# Altium PCB CoreV1.1_test.PcbDoc (part 3 of 14)
Units mil, origin at the board's own origin, x right, y up, seen from the top; angles counter-clockwise.
Board outline 2860 x 2420 mil, 6 copper layers (Top Layer, GND, SIGNAL_1, SIGNAL_2, POWER, Bottom Layer); 110 components, 241 nets, 882 pads, 697 vias.
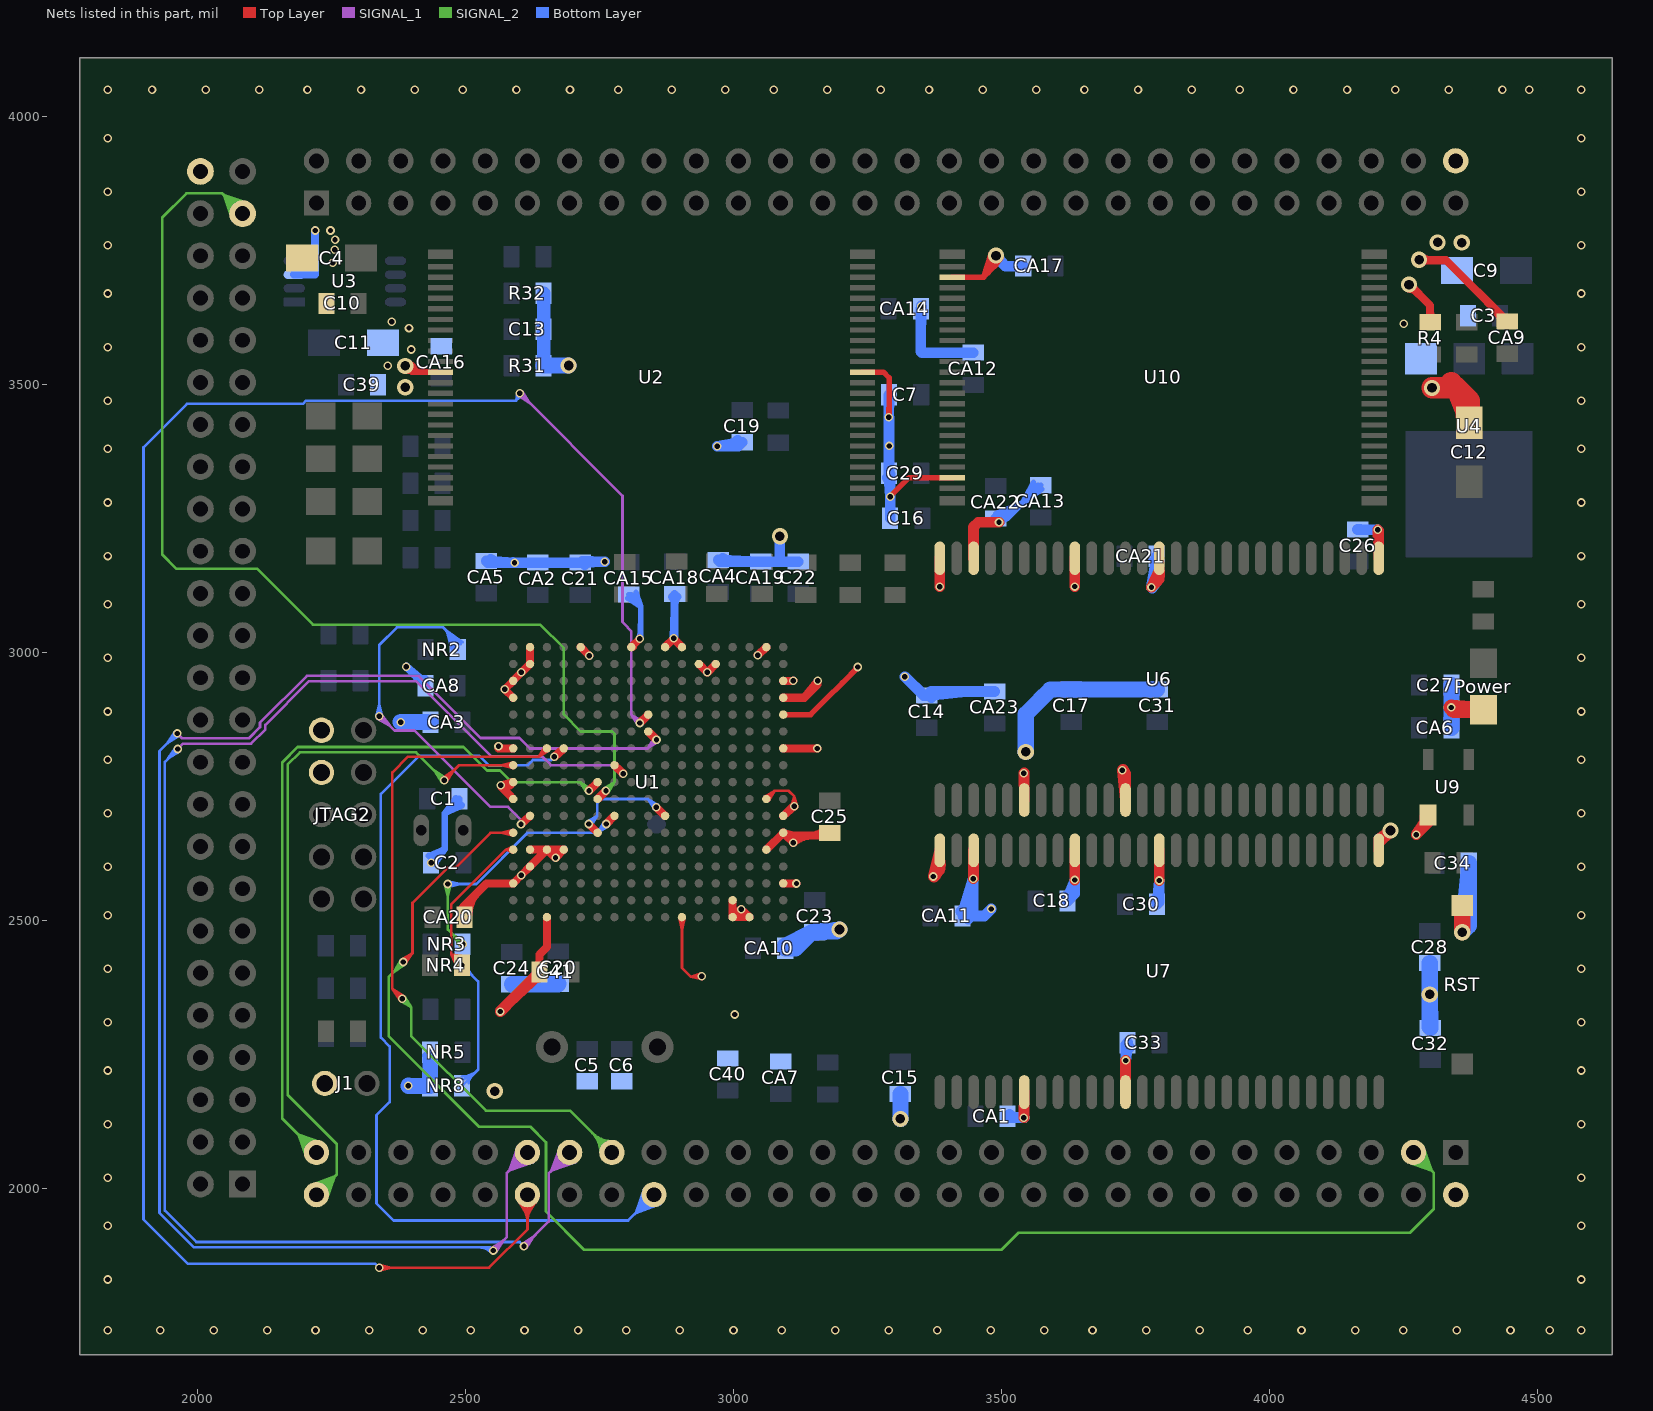
[diagram p7: the nets of this part, all layers, seen from the top]

## Via types
v1: diameter 16, hole 10, Top Layer to Bottom Layer, tented both sides, 637 vias
v2: diameter 30, hole 18, Top Layer to Bottom Layer, tented both sides, 56 vias
v3: diameter 16, hole 10, Top Layer to Bottom Layer, 2 vias
v4: diameter 30, hole 16, Top Layer to Bottom Layer, tented both sides, 1 vias
v5: diameter 16/16/16/16 (per signal layer), hole 10, Top Layer to Bottom Layer, tented both sides, 1 vias

## Nets (pads, with @x,y where several pads share a name; then routed paths per layer and width w, separated by ;. In a path a pad name is that pad's centre, name@x,y a point inside that pad or via, vN(x,y) a via of type N, cw(c..) or ccw(c..) an arc to the next point about the centre after c; other vN are vias at no path point) (continued)
EINT19: pad.PA3 U1.U12 | length 3718.8
  Top Layer w5: v1@2380.21,2426.91 2401,2439 ; v1@2383.5,2421.5 2384,2422 2401,2439 ; v1(2383.5,2422.5) 2401,2439 ; v1@2383.5,2428 ccw(c2383.5,2443.69) 2394.6,2432.6 ; v1@2387.71,2418.96 2401,2439 ; v1@2389,2422.5 cw(c2399.86,2422.5) 2392.18,2430.18 ; 2575.59,2663.5 ccw(c2575.59,2676.97) U1.U12@2585.12,2667.45 ; 2576.29,2663.5 cw(c2576.29,2651.02) U1.U12@2585.12,2659.85 ; U1.U12@2588.25,2668.98 2566.04,2663.5 ; U1.U12@2588.32,2658.31 2566.04,2663.5 ; 2401,2439 2401,2533 2466,2598 2481.08,2598 2546.58,2663.5 2588.77,2663.5 U1.U12@2588.92,2663.65 2566.04,2663.5
  SIGNAL_2 w5: 2373.4,2411.4 ccw(c2362.31,2422.5) v1@2378,2422.5 ; 2375.82,2413.82 cw(c2383.5,2406.14) v1@2383.5,2417 ; v1@2379.13,2425.84 2365.53,2403.53 ; v1@2387.07,2418.32 2365.53,2403.53 ; 3812.81,1917.19 3800,1917.19 ; pad.PA3@4257.72,2049.22 4303.27,2032.83 ; pad.PA3@4259.7,2053.92 4303.27,2032.83 ; pad.PA3@4262.13,2058.34 4303.27,2032.83 ; pad.PA3@4264.99,2062.46 4303.27,2032.83 ; pad.PA3@4269.04,2045.93 cw(c4269.04,1994.94) 4305.1,2031 cw(c4341.15,2067.06) pad.PA3@4290.16,2067.06 ; pad.PA3@4269.04,2050.93 cw(c4269.04,2012.01) 4296.56,2039.53 cw(c4324.08,2067.06) pad.PA3@4285.16,2067.06 ; pad.PA3@4269.04,2055.93 cw(c4269.04,2029.08) 4288.03,2048.07 cw(c4307.01,2067.06) pad.PA3@4280.16,2067.06 ; pad.PA3@4269.04,2067.06 4307,2029.1 4307,1962 4262.19,1917.19 3800,1917.19 ; pad.PA3@4273.63,2071.1 4303.27,2032.83 ; pad.PA3@4277.76,2073.97 4303.27,2032.83 ; pad.PA3@4282.18,2076.4 4303.27,2032.83 ; pad.PA3@4286.87,2078.37 4303.27,2032.83 ; 2365.53,2403.53 v1(2383.5,2422.5) 2383.5,2421.5 2356.5,2394.5 2356.5,2284.01 2525.51,2115 2621,2115 2650,2086 2650,1957 2721.5,1885.5 3500.42,1885.5 3532.11,1917.19 3800,1917.19
EINT20: pad.PB47 U1.M10 | length 2952.9
  Top Layer w5: U1.M10@2746.4,2732.01 ccw(c2746.4,2744.99) 2755.57,2735.81 ccw(c2764.75,2726.64) U1.M10@2751.77,2726.64 ; v1@2756.5,2742.24 cw(c2743.22,2742.24) 2752.61,2732.85 cw(c2762,2723.46) v1@2762,2736.74 ; v1@2756.97,2744.46 U1.M10@2750.63,2723.33 ; v1@2757.66,2745.61 U1.M10@2746.4,2726.64 ; v1@2758.6,2746.56 U1.M10@2743.09,2730.87 ; v1@2764.22,2737.21 U1.M10@2743.09,2730.87 ; v1@2765.37,2737.9 U1.M10@2746.4,2726.64 ; v1@2766.32,2738.84 U1.M10@2750.63,2723.33 ; U1.M10@2743.09,2730.87 v1(2762,2742.24) ; U1.M10@2743.09,2730.87 v1(2762,2742.24) ; U1.M10@2746.4,2726.64 v1(2762,2742.24) ; U1.M10@2746.4,2726.64 v1(2762,2742.24) ; U1.M10@2750.63,2723.33 v1(2762,2742.24) ; U1.M10@2750.63,2723.33 v1(2762,2742.24)
  SIGNAL_2 w5: pad.PB47@2061.5,3819.21 ccw(c2008.66,3819.63) 2046.03,3857 ccw(c2083.39,3894.36) pad.PB47@2083.82,3841.52 ; pad.PB47@2064.94,3807.07 2048.39,3854.63 ; pad.PB47@2066.5,3819.17 ccw(c2025.4,3819.5) 2054.46,3848.56 ccw(c2083.53,3877.62) pad.PB47@2083.86,3836.52 ; pad.PB47@2069.66,3808.99 2048.39,3854.63 ; pad.PB47@2071.5,3819.13 ccw(c2042.15,3819.36) 2062.9,3840.12 ccw(c2083.66,3860.88) pad.PB47@2083.9,3831.52 ; pad.PB47@2074.13,3811.35 2048.39,3854.63 ; pad.PB47@2078.32,3814.13 2048.39,3854.63 ; pad.PB47@2084,3819.02 2046.02,3857 1979,3857 1934,3812 1934,3182.5 1959.9,3156.6 2110.9,3156.6 2215.39,3052.11 2639.34,3052.11 2683.41,3008.04 2683.41,2884.12 2714.8,2852.72 2733.78,2852.72 ; pad.PB47@2088.89,3824.71 2048.39,3854.63 ; pad.PB47@2091.67,3828.89 2048.39,3854.63 ; pad.PB47@2094.04,3833.36 2048.39,3854.63 ; pad.PB47@2095.95,3838.09 2048.39,3854.63 ; 2733.5,2853 2733.78,2852.72 ; v1@2758.61,2746.57 2778.02,2758.26 ; v1(2762,2742.24) 2778.02,2758.26 ; v1@2762,2747.74 ccw(c2762,2761.02) 2771.39,2751.63 ccw(c2780.78,2742.24) v1@2767.5,2742.24 ; v1@2766.33,2738.85 2778.02,2758.26 ; 2733.78,2852.72 2773.94,2852.72 2778,2848.67 2778,2780.7 2778.02,2758.26
GND: C1.2 C2.2 C3.2 C4.2 C5.2 C6.2 C7.2 C9.2 C10.2 C11.2 C12.2 C13.2 C14.2 C15.2 C16.2 C17.2 C18.2 C19.2 C20.2 C21.2 C22.2 C23.2 C24.2 C25.2 C26.2 C27.2 C28.2 C29.2 C30.2 C31.2 C32.2 C33.2 C34.2 C39.2 C40.2 C41.2 CA1.2 CA2.2 CA3.2 CA4.2 CA5.2 CA6.2 CA7.2 CA8.2 CA9.2 CA10.2 CA11.2 CA12.2 CA13.2 CA14.2 CA15.2 CA16.2 CA17.2 CA18.2 CA19.2 CA20.2 CA21.2 CA22.2 CA23.2 J1.2 JTAG2.8 JTAG2.10 NR5.2 NR8.2 pad.PA2 pad.PB50 pad.PC56 Power.2 R4.2 R31.1 R32.1 RST.2 U1.A3 U1.A4 U1.A5 U1.A7 U1.A11 U1.A12 U1.A15 U1.B1 U1.B10 U1.B13 U1.C17 U1.D16 U1.D17 U1.E2 U1.F2 U1.G1 U1.G17 U1.H1 U1.H11 U1.K1 U1.M12 U1.N1 U1.P13 U1.R13 U1.R17 U1.T1 U1.T2 U1.T13 U1.T14 U1.U3 U1.U4 U1.U7 U1.U9 U1.U10 U1.U15 U2.13 U2.36 U3.3 U4.2 U6.6 U6.12 U6.28 U6.41 U6.46 U6.52 U6.54 U7.6 U7.12 U7.28 U7.41 U7.46 U7.52 U7.54 U9.1 U10.27 U10.46 | length 19720
  Top Layer w5: U1.G17@2898.54,2505.53 2903.88,2483.29 U1.G17@2909.21,2505.53 ; U1.G17@2900.08,2502.36 cw(c2890.9,2493.19) 2903.88,2493.19 cw(c2916.85,2493.19) U1.G17@2907.68,2502.36 ; U1.G17@2903.88,2506.16 2903.88,2411.12 2920,2395 ; 2925.31,2395 ccw(c2925.31,2411.69) v1@2937.11,2399.89 ; 2930.14,2395 cw(c2930.14,2385.14) v1@2937.11,2392.11 ; v1@2940.02,2401.41 2920,2395 ; v1@2940.54,2390.52 2920,2395 ; U1.B10@3058.06,2730.88 3076.73,2742.01 ; U1.B10@3061.36,2726.64 3076.73,2742.01 ; U1.B10@3061.36,2732.01 ccw(c3061.36,2744.99) 3070.53,2735.81 ccw(c3079.71,2726.64) U1.B10@3066.73,2726.64 ; U1.B10@3065.6,2723.34 3076.73,2742.01 ; v1@3108.06,2713.82 3113.5,2731.51 ; v1@3109.61,2716.89 ccw(c3100.22,2726.28) 3113.5,2726.28 ccw(c3126.78,2726.28) v1@3117.39,2716.89 ; v1(3113.5,2713) 3113.5,2731.51 ; v1@3118.94,2713.82 3113.5,2731.51 ; v1@3232,2972 v1(3232,2973) ; 2920,2395 2940,2395 v1(2941,2396) 2920,2395 ; 3076.73,2742.01 3103,2742.01 3113.5,2731.51
  Top Layer w10: v2@2386.09,3525.1 U2.36@2434.72,3523.21 ; v2@2394.57,3542.07 ccw(c2440.11,3587.61) U2.36@2440.11,3523.21 ; 2399.8,3523.21 U2.36@2434.72,3523.21 ; 2415.97,3523.21 cw(c2415.97,3563.47) v2(2387.5,3535) ; U2.36@2453.42,3523.21 2399.29,3523.21 v2(2387.5,3535) ; U1.A11@3092.85,2695.14 U1.A11@3094.71,2697 ; U1.A5@3092.85,2884.12 3144.12,2884.12 v1@3232,2972 ; 3203.32,2943.32 v1(3232,2973) ; 3226.17,2966.17 ccw(c3219.34,2973) v1@3229,2973 ; U2.13@3240.83,3523.21 3279.95,3523.21 ; U2.13@3259.53,3523.21 3279.95,3523.21 ; v1@3287.88,3441.12 ccw(c3281.82,3447.18) 3290.39,3447.18 ; 3290.39,3477.01 v1(3290,3439) 3290.39,3439.39 3290.39,3512.77 3279.95,3523.21 ; v1(3292.39,3291) 3327.75,3326.36 U10.46@3408.42,3326.36 ; 3354.8,3326.36 U10.46@3389.72,3326.36 ; U10.27@3408.42,3700.37 3466.94,3700.37 ; U10.27@3427.12,3700.37 3462.05,3700.37 ; 3475.47,3708.91 ccw(c3457.7,3726.68) v2@3480.81,3736.57 ; v2@3480.84,3744.52 3466.94,3700.37 ; v2@3484.52,3732.13 cw(c3478.5,3722.93) 3489.5,3722.93 ; 3485.92,3719.36 ccw(c3472.34,3732.94) v2(3490,3740.5) ; v1@3492.5,3246 v1(3495.5,3243) ; v2@3494.74,3731.69 ccw(c3499.45,3722.93) 3489.5,3722.93 ; v2@3498.08,3734.61 3466.94,3700.37 ; U6.46@3633.67,3150.84 cw(c3625.41,3142.57) 3637.1,3142.57 cw(c3648.79,3142.57) U6.46@3640.52,3150.84 ; U6.46@3637.1,3154.26 3637.1,3141.9 U6.46@3637.1,3175.91 ; v2(2387.5,3535) U2.36@2434.72,3523.21 ; 3466.94,3700.37 3489.5,3722.93 ; 3466.94,3700.37 v2(3490,3740.5) ; 3489.5,3722.93 3489.5,3740 v2(3490,3740.5) ; 3489.5,3722.93 3499.5,3737.38 3489.5,3722.93 ; 3489.5,3722.93 3480.34,3737.93 3489.5,3722.93 ; 3489.5,3722.93 v2(3490,3740.5) ; 3489.5,3722.93 v2(3490,3740.5)
  Top Layer w15: CA20.2@2490.61,2510.65 cw(c2514.65,2510.65) 2497.65,2527.65 ; CA20.2@2492.95,2516.09 ccw(c2481.55,2528.11) 2498.11,2528.11 ; CA20.2@2498.11,2505.65 2498.11,2528.11 ; CA20.2@2503.27,2516.09 cw(c2514.68,2528.11) 2498.11,2528.11 ; CA20.2@2505.61,2510.65 cw(c2565.87,2510.65) 2523.26,2553.26 ; v1@2561.85,2825.35 ccw(c2572.06,2835.56) 2572.06,2821.13 ; v1@2573.23,2752.01 ccw(c2573.23,2773.82) U1.U9@2588.65,2758.4 ; U1.U7@2588.92,2821.13 v1@2565.37,2821.13 ; U1.U3@2588.92,2945.78 U1.U3@2588.92,2947.11 ; C41.2@2632.58,2414.15 ccw(c2619.78,2426.95) 2637.89,2426.95 ccw(c2655.99,2426.95) C41.2@2643.19,2414.15 ; C41.2@2637.89,2403.85 2637.89,2436.28 ; C41.2@2637.89,2408.85 2637.89,2436.28 ; U1.R17@2651.91,2506.16 2651.91,2450.3 2637.89,2436.28 ; v1@2667.47,2616.71 ccw(c2651.91,2616.59) U1.R13@2651.91,2632.15 ; U1.K1@2812.07,3010.1 U1.K1@2809.39,3010.1 ; v1@3013.75,2521.55 v1@3013,2520.8 ; v1@3014,2520.83 cw(c2998.37,2521.83) U1.D17@2998.37,2506.16 ; v1@3015,2520.81 ccw(c3029.86,2521.03) U1.C17@3029.86,2506.16 ; U1.B13@3061.36,2632.15 3076.71,2647.5 ; U1.A12@3092.85,2663.35 3077,2647.5 U1.A12@3092.85,2663.65 ; U1.A7@3092.85,2821.13 3145.73,2821.13 ; U1.A4@3092.85,2915.61 3132.48,2915.61 ; U1.A12@3093.12,2663.91 ccw(c3106.18,2676.97) 3106.18,2658.5 ; U1.A7@3097.85,2821.13 3155.87,2821.13 v1@3151,2821 ; U1.A7@3097.95,2821.13 v1(3156.5,2821) 3103.5,2821.13 ; 3101.25,2655.25 cw(c3109.09,2647.41) 3109.09,2658.5 ; v1@3111.85,2644.65 cw(c3145.3,2611.2) 3145.3,2658.5 ; 3144.75,2658.5 ccw(c3144.75,2693.3) C25.2@3169.35,2668.69 ; 3151.29,2934.42 ccw(c3138.72,2947) v1@3156.5,2947 ; C25.2@3179.65,2663.39 3174.77,2658.5 3111.5,2658.5 ; v2@4260.5,3679 cw(c4260.5,3658.48) 4275.01,3672.99 ; v2(4260.5,3686.5) 4300.09,3647.91 ; v2@4261.5,3686.5 4300.09,3647.91 ; v2@4268,3686.5 ccw(c4283.69,3686.5) 4272.6,3675.4 ; v2(4279.5,3733) 4329.96,3732 ; v2@4282,3732 4329.96,3732 ; v2@4284.8,3727.7 cw(c4295.19,3717.31) 4295.19,3732 ; v2@4284.8,3738.3 ccw(c4300.02,3753.52) 4300.02,3732 ; R4.2@4294.79,3621.57 ccw(c4281.98,3634.38) 4300.09,3634.38 ccw(c4318.2,3634.38) R4.2@4305.39,3621.57 ; R4.2@4300.09,3616.27 4300.09,3647.91 ; 4397.53,3664.43 CA9.2@4439.35,3617.61 ; 4423.01,3638.95 cw(c4401.67,3617.61) CA9.2@4431.85,3617.61 ; CA9.2@4444.35,3617.61 4329.96,3732 ; 2498.11,2528.11 2539.16,2569.16 ; 2498.11,2528.11 2498.11,2510.65 2498.11,2528.11 ; 2539.16,2569.16 U1.U15@2588.92,2569.16 ; 2539.16,2569.16 U1.U15@2588.92,2569.16 ; v1@2565.37,2821.13 v1(2561.5,2825) 2561.63,2821.13 v1@2565.37,2821.13 ; v1@2565.99,2749.57 U1.U10@2588.92,2726.64 ; v1@2565.99,2749.57 v1(2565.99,2752.01) ; v1@2565.99,2749.57 U1.U10@2588.92,2726.64 ; v1(2565.99,2752.01) 2582.79,2752.01 U1.U9@2588.92,2758.13 v1(2565.99,2752.01) ; v1(2565.99,2752.01) U1.U10@2588.92,2726.64 ; v1(2565.99,2752.01) U1.U10@2588.92,2726.64 ; v1(2573,2931.5) U1.U4@2588.92,2915.61 ; v1(2573,2931.5) U1.U3@2588.92,2947.11 ; v1(2573,2931.5) U1.U4@2588.92,2915.61 ; v1(2573,2931.5) U1.U3@2588.92,2947.11 ; v1(2573,2931.5) U1.U4@2588.92,2915.61 ; v1(2573,2931.5) v1@2573.31,2931.5 ; v1(2573,2931.5) U1.U4@2588.92,2915.61 ; v1@2573.31,2931.5 U1.U3@2588.92,2947.11 ; v1@2573.31,2931.5 U1.U3@2588.92,2947.11 ; U1.U15@2588.92,2569.16 v1(2604.13,2584.37) ; U1.U15@2588.92,2569.16 v1(2604.13,2584.37) ; U1.U3@2588.92,2947.11 U1.U3@2588.92,2947.92 ; U1.U3@2588.92,2947.11 v1(2604,2963) ; U1.U3@2588.92,2947.11 v1(2604,2963) ; U1.U3@2588.92,2947.92 v1(2604,2963) ; U1.U3@2588.92,2947.92 v1(2604,2963) ; v1(2604,2963) v1@2604.81,2963 ; v1(2604,2963) U1.T2@2620.41,2978.61 ; v1(2604,2963) U1.T2@2620.41,2978.61 ; v1(2604.13,2584.37) U1.T14@2620.41,2600.65 ; v1(2604.13,2584.37) U1.T14@2620.41,2600.65 ; v1@2604.81,2963 U1.T2@2620.41,2978.61 ; v1@2604.81,2963 U1.T2@2620.41,2978.61 ; U1.T14@2620.41,2600.65 U1.R13@2651.91,2632.15 ; U1.T14@2620.41,2600.65 U1.R13@2651.91,2632.15 ; U1.T2@2620.41,2978.61 U1.T1@2620.41,3010.1 U1.T2@2620.41,2978.61 ; U1.R13@2651.91,2632.15 2667.97,2632.15 ; U1.R13@2651.91,2632.15 U1.T13@2620.41,2632.15 U1.R13@2651.91,2632.15 ; U1.R13@2651.91,2632.15 v1(2667.97,2616.71) ; v1(2667.97,2616.71) U1.P13@2683.41,2632.15 ; v1(2667.97,2616.71) U1.P13@2683.41,2632.15 ; v1(2667.97,2616.71) 2667.97,2632.15 ; v1(2667.97,2616.71) U1.P13@2683.41,2632.15 ; v1(2667.97,2616.71) 2667.97,2632.15 ; v1(2667.97,2616.71) U1.P13@2683.41,2632.15 ; v1(2667.97,2616.71) 2667.97,2632.15 ; 2667.97,2632.15 U1.P13@2683.41,2632.15 ; 2667.97,2632.15 U1.P13@2683.41,2632.15 ; U1.K1@2809.39,3010.1 v1(2825,3025.71) U1.K1@2809.39,3010.1 ; v1(2856,2711) v1@2856.52,2711 ; v1(2856,2711) U1.H11@2872.38,2695.14 ; v1(2856,2711) U1.H11@2872.38,2695.14 ; v1@2856.52,2711 U1.H11@2872.38,2695.14 ; v1@2856.52,2711 U1.H11@2872.38,2695.14 ; v1@2888.5,3025.48 U1.G1@2903.88,3010.1 ; v1@2888.5,3025.48 v1@2888.5,3026.22 ; v1@2888.5,3025.48 U1.G1@2903.88,3010.1 ; v1@2888.5,3026.22 2888.64,3026.36 2888.78,3026.5 v1(2888.5,3026.5) ; v1@2888.5,3026.22 v1(2888.5,3026.5) ; v1@2888.5,3026.22 U1.H1@2872.38,3010.1 v1(2888.5,3026.5) ; v1(2888.5,3026.5) U1.G1@2903.88,3010.1 ; v1(2888.5,3026.5) U1.G1@2903.88,3010.1 ; v1(2951.26,2963) U1.E2@2966.87,2978.61 v1(2951.26,2963) ; v1(2951.26,2963) 2950.98,2963 U1.F2@2935.37,2978.61 v1(2951.26,2963) ; U1.D17@2998.37,2506.16 3014.5,2506.16 ; U1.D17@2998.37,2506.16 U1.D16@2998.37,2537.66 U1.D17@2998.37,2506.16 ; U1.D17@2998.37,2506.16 v1@3013,2520.8 ; U1.D17@2998.37,2506.16 U1.C17@3029.86,2506.16 ; U1.D17@2998.37,2506.16 v1(3014.5,2520.8) ; U1.D17@2998.37,2506.16 v1(3014.5,2520.8) ; U1.D17@2998.37,2506.16 v1(3014.5,2520.8) ; v1@3013,2520.8 v1(3014.5,2520.8) ; 3014.5,2506.16 U1.C17@3029.86,2506.16 ; 3014.5,2506.16 U1.C17@3029.86,2506.16 ; 3014.5,2506.16 U1.C17@3029.86,2506.16 ; 3014.5,2506.16 v1(3014.5,2520.8) ; 3014.5,2506.16 v1(3014.5,2520.8) ; 3014.5,2506.16 v1(3014.5,2520.8) ; 3014.5,2506.16 v1(3014.5,2520.8) ; v1(3014.5,2520.8) U1.C17@3029.86,2506.16 ; v1(3014.5,2520.8) U1.C17@3029.86,2506.16 ; v1(3014.5,2520.8) U1.C17@3029.86,2506.16 ; v1(3014.5,2520.8) U1.C17@3029.86,2506.16 ; v1(3045,2995) v1@3046.26,2995 ; v1(3045,2995) U1.B1@3061.36,3010.1 ; v1(3045,2995) U1.B1@3061.36,3010.1 ; v1@3046.26,2995 U1.B1@3061.36,3010.1 ; v1@3046.26,2995 U1.B1@3061.36,3010.1 ; U1.A12@3092.85,2663.65 U1.A12@3098,2658.5 ; U1.A12@3092.85,2663.65 3111.5,2658.5 ; U1.A12@3092.85,2663.65 v1(3111.5,2645) ; U1.A12@3092.85,2663.65 v1(3111.5,2645) ; U1.A12@3092.85,2663.65 v1(3111.5,2645) ; U1.A12@3098,2658.5 3111.5,2658.5 ; U1.A12@3098,2658.5 v1(3111.5,2645) ; U1.A12@3098,2658.5 v1(3111.5,2645) ; U1.A12@3098,2658.5 v1(3111.5,2645) ; v1@3110.71,2713 3094.71,2697 v1(3113.5,2713) ; v1@3110.71,2713 v1(3113.5,2713) ; v1@3110.71,2713 U1.A11@3092.85,2695.14 v1(3113.5,2713) ; v1(3111.5,2645) 3111.5,2658.5 ; v1(3111.5,2645) 3111.5,2658.5 ; v1(3111.5,2645) 3111.5,2658.5 ; 3132.48,2915.61 3157,2940.13 v1(3157,2947) 3132.48,2915.61 ; U1.N1@2714.9,3010.1 v1(2731,2994) U1.N1@2714.9,3010.1 ; v1(2730.04,2680) U1.M12@2746.4,2663.65 v1(2730.04,2680) ; U1.A15@3092.85,2569.16 3117.34,2569.16 v1(3117.5,2569) U1.A15@3092.85,2569.16 ; U1.A3@3092.85,2947.11 3111.19,2947.11 v1(3111.54,2947.46) U1.A3@3092.85,2947.11
  Top Layer w20: 2580.46,2346.42 C41.2@2637.89,2398.85 ; 2614.91,2380.87 v1(2565,2330) 2565,2330.96 C41.2@2637.89,2403.85 ; 2620.82,2386.77 cw(c2637.89,2369.7) C41.2@2637.89,2393.85 ; v1@3374.41,2580.59 ccw(c3348.55,2606.45) U7.54@3385.13,2606.45 ; 3380.57,2589.57 ccw(c3366.87,2603.27) U7.54@3385.28,2609.31 ; U6.52@3448.12,3175.91 3448.12,3234.12 ; U6.52@3448.12,3197.57 3448.12,3234.12 ; U7.46@3637.1,2609.26 v1(3637.1,2575.6) U7.46@3637.1,2630.91 ; U6.46@3637.1,3154.26 v1(3637.1,3123.1) U6.46@3637.1,3175.91 ; v1@3726.91,2781.91 cw(c3715.64,2770.64) 3731.58,2770.64 ; 3788.84,3130.84 ccw(c3772.2,3147.49) U6.41@3794.73,3154.31 ; U7.41@3794.58,2609.26 v1(3794.58,2574.5) U7.41@3794.58,2630.91 ; U6.41@3794.58,3175.91 3794.58,3136.58 ; U7.28@4204.02,2630.91 U7.28@4204.02,2644.02 ; U7.28@4204.02,2652.41 ccw(c4204.02,2672.66) v2@4218.34,2658.34 ; 4216.05,2656.05 ccw(c4204.1,2668) v2@4221,2668 ; v1@4279.33,2665.33 ccw(c4252.53,2692.13) U9.1@4290.43,2692.74 ; U9.1@4296.17,2692.84 v1(4274,2660) 4296.17,2682.17 U9.1@4296.17,2696.77 ; v1(3373,2582) 3385.13,2594.13 ; v1(3373,2582) U7.54@3385.13,2609.26 ; v1(3373,2582) U7.54@3385.13,2609.26 ; v1(3373,2582) U7.54@3385.13,2609.26 ; v1(3373,2582) U7.54@3385.13,2630.91 3385.13,2594.13 ; v1(3385,3123) v1@3385.13,3123.13 ; v1(3385,3123) U6.54@3385.13,3175.91 v1@3385.13,3123.13 ; v1(3385,3123) 3385.13,3154.26 v1@3385.13,3123.13 ; 3385.13,2594.13 U7.54@3385.13,2609.26 ; 3385.13,2594.13 U7.54@3385.13,2609.26 ; v1(3447.5,2578) v1@3448.12,2578.62 ; v1(3447.5,2578) 3448.12,2609.26 v1@3448.12,2578.62 ; v1(3447.5,2578) U7.52@3448.12,2630.91 v1@3448.12,2578.62 ; 3448.12,3234.12 3457,3243 ; 3457,3243 v1(3495.5,3243) 3457,3243 ; v1(3542,2132) v1@3542.61,2132.61 ; v1(3542,2132) U7.6@3542.61,2179.73 v1@3542.61,2132.61 ; v1(3542,2132) 3542.61,2158.08 v1@3542.61,2132.61 ; v1(3542,2774.79) 3542.61,2775.39 v1@3542.61,2774.79 ; v1(3542,2774.79) 3542.61,2746.39 v1@3542.61,2774.79 ; v1(3542,2774.79) U6.6@3542.61,2724.73 v1@3542.61,2774.79 ; v1(3725.5,2780.5) 3731.58,2774.42 ; v1(3725.5,2780.5) 3731.58,2746.39 3731.58,2774.42 ; v1(3725.5,2780.5) U6.12@3731.58,2724.73 3731.58,2774.42 ; v1@3731.58,2238.37 U7.12@3731.58,2179.73 v1(3732,2238.79) ; v1@3731.58,2238.37 v1(3732,2238.79) ; v1@3731.58,2238.37 3731.58,2201.39 v1(3732,2238.79) ; 3794.58,3136.58 v1(3780,3122) U6.41@3794.58,3154.26 ; 3794.58,3136.58 U6.41@3794.58,3154.26 ; 3794.58,3136.58 U6.41@3794.58,3154.26 ; v1(4202.5,3229) v1@4204.02,3227.48 ; v1(4202.5,3229) U6.28@4204.02,3175.91 v1@4204.02,3227.48 ; v1(4202.5,3229) 4204.02,3197.57 v1@4204.02,3227.48 ; U7.28@4204.02,2644.02 v2@4226,2666 ; U7.28@4204.02,2644.02 v2(4226,2668) ; v2@4226,2666 v2(4226,2668) ; v2@4226,2666 4204.02,2652.57 v2(4226,2668)
  Top Layer w30: v2(4360,2478) RST.2@4360,2527.64 ; v1(4339.61,2897.5) 4344.15,2892.97 Power.2@4399.59,2892.97 v1(4339.61,2897.5)
  Top Layer w40: v2(4303.5,3494) 4349,3494 ; v2@4304.89,3494 4349,3494 ; 4339.16,3503.84 cw(c4269.13,3433.8) C12.2@4368.17,3433.8 ; C12.2@4373.17,3428.8 4373.17,3469.83 ; 4349,3494 4373.17,3469.83 ; 4349,3494 C12.2@4373.17,3433.8 ; C12.2@4373.17,3433.8 4373.17,3469.83 ; C12.2@4373.17,3433.8 4373.17,3469.83
  Bottom Layer w5: v1@2726.66,2684.33 2746,2695.96 ; v1(2730.04,2680) 2746,2695.96 ; v1@2730.04,2685.5 ccw(c2730.04,2698.78) 2739.43,2689.39 ccw(c2748.82,2680) v1@2735.54,2680 ; v1@2734.38,2676.61 2746,2695.96 ; v1@2850.5,2711 ccw(c2837.22,2711) 2846.61,2720.39 ccw(c2856,2729.78) v1@2856,2716.5 ; v1@2851.65,2707.63 2840.49,2726.51 ; v1@2859.37,2715.35 2840.49,2726.51 ; 2746,2695.96 2746,2719 2753.51,2726.51 2840.49,2726.51 ; 2840.49,2726.51 v1(2856,2711) 2840.49,2726.51
  Bottom Layer w10: CA15.2@2802.65,3100.96 2827,3085.73 ; CA15.2@2804.35,3108.39 2827,3085.73 ; CA15.2@2809.35,3098.39 cw(c2809.35,3086.32) CA15.2@2817.88,3094.85 ; CA15.2@2809.35,3108.39 2827,3085.73 ; CA15.2@2818.18,3113.07 2827,3085.73 ; CA15.2@2819.13,3106.32 ccw(c2838.49,3102.23) 2824.5,3088.23 ; v1@2822.88,3027.83 ccw(c2812.93,3037.78) 2827,3037.78 ; 2827,3063.96 v1(2825,3025.71) 2827,3027.71 2827,3085.73 ; v2@3488.5,3740 3489.5,3740 v2(3490,3740.5) ; CA22.2@3489.35,3249.15 v1(3495.5,3243) ; CA22.2@3489.35,3250.39 3495.5,3250.39 3511.43,3250.39 ; CA22.2@3489.64,3259.21 3543.16,3282.12 ; CA22.2@3494.35,3260.39 ccw(c3494.35,3325.77) 3540.58,3279.54 ; CA22.2@3498.25,3241.79 cw(c3511.43,3235.98) 3511.43,3250.39 ; CA22.2@3500.5,3242.5 3543.16,3282.12 ; 3523.51,3262.47 cw(c3494.35,3291.63) 3494.35,3250.39 3543.16,3282.12 ; 3527.2,3271.75 v1(3495.5,3243) ; 3528.1,3268.14 v1(3495.5,3243) ; 3547.55,3286.51 ccw(c3521.94,3312.11) CA13.2@3558.15,3312.11 ; CA13.2@3559.62,3298.58 cw(c3568.15,3290.04) CA13.2@3568.15,3302.11 ; CA13.2@3559.94,3317.81 3536.94,3275.9 ; CA13.2@3568.15,3312.11 3536.94,3275.9 ; CA13.2@3573.15,3312.11 3511.43,3250.39 ; CA13.2@3575,3304.83 3536.94,3275.9 ; CA21.2@3779.76,3172.62 3789.61,3145.39 ; CA21.2@3782.54,3167.27 cw(c3765.47,3150.2) 3789.61,3150.2 cw(c3813.75,3150.2) CA21.2@3796.68,3167.27 ; CA21.2@3789.61,3174.35 3789.61,3145.39 ; CA21.2@3789.61,3179.35 3789.61,3145.39 ; CA21.2@3799.46,3172.62 3789.61,3145.39 ; v1(3495.5,3243) 3511.43,3250.39
  Bottom Layer w12: NR8.2@2424.53,2195.75 NR5.2@2425.29,2247.09 ; NR8.2@2424.82,2198.79 NR5.2@2442.68,2246.94 ; NR5.2@2425.04,2248.52 NR8.2@2434,2198.32 ; NR8.2@2427.14,2202.77 ccw(c2410.58,2219.34) 2434,2219.34 ; NR5.2@2427.64,2242.95 cw(c2412.27,2227.59) 2434,2227.59 cw(c2455.73,2227.59) NR5.2@2440.36,2242.95 ; C2.2@2431.26,2620.37 2461.5,2633.27 ; NR8.2@2433.5,2191.41 2434,2191.91 NR5.2@2434,2254.32 ; 2434,2216.94 ccw(c2454.03,2216.94) NR8.2@2439.87,2202.77 ; NR5.2@2434,2249.32 NR8.2@2434,2198.32 ; C2.2@2435.89,2612.65 2461.5,2633.27 ; C2.2@2435.89,2621.65 ccw(c2435.89,2655.45) 2459.79,2631.55 ; NR8.2@2442.23,2198.62 NR5.2@2425.29,2247.09 ; NR8.2@2442.47,2195.58 NR5.2@2442.68,2246.94 ; C2.2@2442.44,2606.48 2461.5,2633.27 ; NR5.2@2442.96,2248.52 NR8.2@2434,2198.32 ; 2464.71,2703.45 cw(c2488.61,2679.55) C1.2@2488.61,2713.35 ; C1.2@2482.07,2728.53 2461.5,2700.23 ; C1.2@2488.61,2722.35 2461.5,2700.23 ; C1.2@2488.61,2727.35 2461.5,2700.23 ; C1.2@2493.36,2714.7 2461.5,2700.23 ; C24.2@2586.35,2377.39 C24.2@2587.35,2378.39 ; NR5.2@2425.29,2247.09 NR8.2@2433.5,2196.41 ; NR8.2@2433.5,2196.41 NR5.2@2434,2247.41 ; NR8.2@2433.5,2196.41 NR5.2@2442.68,2246.94 ; NR8.2@2433.5,2196.41 NR5.2@2434,2247.41 ; NR5.2@2434,2247.41 2424.55,2197.29 NR5.2@2434,2247.41 ; NR5.2@2434,2247.41 2442.48,2197.12 NR5.2@2434,2247.41 ; v1(2435.89,2607.65) 2461.5,2633.27 ; v1(2435.89,2607.65) 2461.5,2633.27 ; v1(2435.89,2607.65) 2461.5,2633.27 ; v1(2435.89,2607.65) 2461.5,2633.27 ; 2461.5,2633.27 2461.5,2700.23
  Bottom Layer w15: U3.3@2180.32,3705.25 2219.5,3705.25 ; U3.3@2192.33,3705.25 2219.5,3705.25 ; 2219.5,3734.5 v1(2219.5,3787.5) ; v1@2219.5,3785 2219.5,3705.25 ; 2404.05,2958.99 ccw(c2425.39,2980.33) CA8.2@2425.39,2950.15 ; CA5.2@2537.65,3171.61 CA5.2@2538.65,3170.61 ; v1@2588.5,3170.61 v1(2591.5,3167.61) ; CA18.2@2885.04,3104.08 cw(c2872.24,3091.28) 2890.35,3091.28 cw(c2908.45,3091.28) CA18.2@2895.65,3104.08 ; 2890.35,3049.39 CA18.2@2890.35,3109.39 2890.35,3028.35 v1(2888.5,3026.5) 2890.35,3079.72 ; C14.2@3360.65,2919.61 C14.2@3368.5,2927.46 ; v1(2389.5,2973.5) CA8.2@2425.39,2937.65 v1(2389.5,2973.5) 2425.39,2942.65 v1(2389.5,2973.5)
  Bottom Layer w20: CA5.2@2538.65,3170.61 2541.66,3167.61 v1(2591.5,3167.61) ; CA5.2@2543.65,3170.61 v1(2591.5,3167.61) ; CA5.2@2547.19,3174.15 ccw(c2562.98,3189.94) 2562.98,3167.61 ; CA2.2@2629.74,3167.61 v1(2591.5,3167.61) ; C21.2@2722.39,3164.07 cw(c2735.77,3150.7) 2735.77,3169.61 ; CA4.2@2971.65,3172.61 CA4.2@2974.65,3169.61 ; CA4.2@2980.19,3176.15 ccw(c2995.97,3191.93) 2995.97,3169.61 ; 2981.44,3385 ccw(c2981.44,3422.3) C19.2@3007.81,3395.92 ; C19.2@3011.35,3392.39 v1(2969.5,3385) 3008.96,3385 C19.2@3016.35,3392.39 ; CA19.2@3055.65,3169.61 3086.5,3169.61 ; v2(3086.5,3217) 3086.5,3169.61 ; C22.2@3115.65,3169.61 3086.5,3169.61 ; C22.2@3120.65,3169.61 3086.5,3169.61 ; C29.2@3286.85,3326.12 cw(c3273.49,3312.75) 3292.39,3312.75 ; C29.2@3290.39,3329.65 v1(3292.39,3291) ; C29.2@3290.39,3339.65 v1(3290.39,3385.5) ; C7.2@3290.39,3475.65 v1(3290,3439) ; C7.2@3290.39,3480.65 3290,3480.27 v1(3290,3439) ; C16.2@3292.39,3250.65 v1(3292.39,3291) ; C16.2@3292.39,3255.65 v1(3292.39,3291) ; 3349.61,3575.01 v1(3350.5,3646.5) 3349.61,3578.4 ; CA14.2@3349.61,3636.85 3349.61,3561.85 ; CA14.2@3349.61,3641.85 3349.61,3561.85 ; C14.2@3355.65,2919.61 v1(3319.5,2955) 3354.89,2919.61 C14.2@3360.65,2919.61 ; C14.2@3365.65,2919.61 3442.33,2927.46 ; 3367.65,3559.61 CA12.2@3442.65,3559.61 ; C14.2@3368.5,2927.46 CA23.2@3487.27,2927.46 ; C14.2@3369.19,2916.08 cw(c3396.67,2888.6) 3396.67,2927.46 ; 3407.27,2927.46 CA23.2@3482.27,2927.46 ; CA11.2@3424.08,2516.88 ccw(c3367.53,2573.43) v1@3447.5,2573.43 ; CA11.2@3427.61,2518.35 ccw(c3427.61,2542.49) 3444.68,2525.42 ; CA11.2@3438.22,2502.74 ccw(c3415.81,2525.15) 3447.5,2525.15 ; CA12.2@3447.65,3559.61 3351.85,3559.61 3349.61,3561.85 ; v1(3481,2521.5) 3467.85,2508.35 CA11.2@3427.61,2508.35 3447.5,2528.23 ; v2@3488.5,3740 3489,3739.5 3507.85,3720.65 ; CA22.2@3489.35,3249.15 CA22.2@3489.35,3250.39 ; v2(3490,3740.5) 3507.85,3720.65 ; v2@3495,3740.5 ccw(c3511.9,3740.5) 3499.95,3728.55 ; CA1.2@3515.15,2137.88 ccw(c3529.35,2152.08) 3529.35,2132 ; CA17.2@3540.39,3720.65 3507.85,3720.65 ; CA17.2@3540.78,3721.31 3507.85,3720.65 ; C18.2@3620.87,2545.53 ccw(c3601.13,2575.59) v1(3637.1,2575.6) ; C18.2@3623.61,2536.35 3637.1,2549.83 v1(3637.1,2575.6) ; C18.2@3623.61,2541.35 v1(3637.1,2575.6) ; v1@3732,2246.4 cw(c3755.64,2246.4) C33.2@3738.92,2263.12 ; C33.2@3735.39,2266.65 v1(3732,2238.79) 3732,2268.27 C33.2@3735.39,2271.65 ; v1@3781.41,3120.59 ccw(c3761.62,3140.38) 3789.61,3140.38 ; C30.2@3787.08,2538.88 ccw(c3768.97,2556.99) 3794.58,2556.99 ; C30.2@3790.61,2530.35 3794.58,2534.31 v1(3794.58,2574.5) C30.2@3790.61,2535.35 ; C26.2@4164.65,3229.61 4165.27,3229 v1(4202.5,3229) C26.2@4169.65,3229.61 ; v1(2591.5,3167.61) CA2.2@2634.74,3167.61 ; CA2.2@2634.74,3167.61 C21.2@2713.86,3167.61 ; CA2.2@2634.74,3167.61 2708.86,3167.61 2639.74,3167.61 C21.2@2713.86,3167.61 ; C21.2@2713.86,3167.61 C21.2@2717.86,3167.61 ; C21.2@2717.86,3167.61 2717.86,3169.93 2736.07,3169.93 2736.39,3169.61 ; C21.2@2717.86,3167.61 2719.86,3169.61 2736.39,3169.61 ; 2736.39,3169.61 v1(2760,3169.61) ; 2736.39,3169.61 v1(2760,3169.61) ; v1(2760,3169.61) 2718.86,3167.61 v1(2760,3169.61) ; CA4.2@2974.65,3169.61 CA19.2@3050.65,3169.61 ; CA4.2@2974.65,3169.61 3045.65,3169.61 2976.65,3172.61 CA19.2@3050.65,3169.61 ; CA19.2@3050.65,3169.61 3086.5,3169.61 ; v1(3290,3439) 3290.39,3438.61 v1(3290.39,3385.5) ; v1(3290,3439) v1(3290.39,3385.5) ; v1(3290.39,3385.5) C29.2@3290.39,3334.65 3292.39,3332.65 v1(3292.39,3291) ; CA11.2@3427.61,2513.35 3447.5,2528.23 ; CA11.2@3427.61,2513.35 v1(3447.5,2578) ; CA11.2@3427.61,2513.35 3447.5,2528.23 ; CA11.2@3427.61,2513.35 v1(3447.5,2578) ; 3447.5,2528.23 v1(3447.5,2578) ; CA1.2@3511.61,2134.35 CA1.2@3513.96,2132 ; CA1.2@3511.61,2134.35 v1(3542,2132) ; CA1.2@3511.61,2134.35 v1(3542,2132) ; CA1.2@3513.96,2132 v1(3542,2132) ; CA1.2@3513.96,2132 v1(3542,2132) ; v1(3780,3122) 3789.61,3131.61 ; v1(3780,3122) CA21.2@3789.61,3179.35 3789.61,3131.61 ; v1(3780,3122) 3789.61,3174.35 3789.61,3131.61
  Bottom Layer w25: C13.2@2645.61,3603.27 R32.1@2645.61,3670.63 2645.5,3608.27 2645.61,3665.63 C13.2@2645.61,3603.27 ; C13.2@2645.61,3603.27 R31.1@2645.61,3535.41 2645.5,3598.27 2645.61,3540.41 C13.2@2645.61,3603.27
  Bottom Layer w30: C20.2@2673.35,2381.89 C20.2@2672.35,2380.89 ; C23.2@3138.44,2470.17 cw(c3096.61,2511.99) CA10.2@3096.61,2452.85 ; v2(3311.35,2129.85) C15.2@3311.35,2176.39 ; v2(3545.5,2814.5) 3545.5,2885 3591.11,2930.61 ; 3571,2910.5 3591.11,2930.61 ; C17.2@3625.65,2930.61 3591.11,2930.61 ; C17.2@3635.65,2930.61 3740.65,2930.61 ; 3680.65,2930.61 C31.2@3785.65,2930.61 ; C31.2@3790.65,2930.61 C17.2@3630.65,2930.61 3591.11,2930.61 ; C28.2@4299.35,2420.39 v2(4299.35,2362) ; CA6.2@4339.61,2859.35 v1(4339.61,2897.5) ; CA6.2@4339.61,2864.35 v1(4339.61,2897.5) ; C27.2@4339.61,2934.35 v1(4339.61,2897.5) ; C27.2@4339.61,2939.35 v1(4339.61,2897.5) ; 4372.12,2507.25 cw(c4330.75,2507.25) v2(4360,2478) ; 4372.12,2586.4 v2(4360,2478) ; C34.2@4372.12,2591.2 v2(4360,2478) ; C34.2@4372.12,2601.94 4372.12,2496.94 v2(4360,2478) ; C34.2@4372.12,2606.94 4372.12,2490.12 v2(4360,2478) ; C20.2@2672.35,2380.89 C24.2@2586.35,2380.89 2668.35,2381.89 2591.35,2380.89 C20.2@2672.35,2380.89 ; CA10.2@3096.61,2452.85 C23.2@3146.31,2478.05 ; CA10.2@3096.61,2452.85 3146.42,2478.05 3116.11,2447.85 ; 3116.11,2447.85 CA10.2@3096.61,2447.85 3116.11,2447.85 ; 3116.11,2447.85 C23.2@3146.31,2478.05 ; C23.2@3146.31,2478.05 C23.2@3151.42,2478.05 C23.2@3152.37,2479 ; C23.2@3152.37,2479 v2@3192.5,2479 ; C23.2@3152.37,2479 v2(3198,2483) ; v2@3192.5,2479 3196.5,2483 v2(3198,2483) ; v2@3192.5,2479 3156.42,2478.05 v2(3198,2483) ; v2(4299.35,2362) 4299.35,2300.92 C32.2@4300.65,2299.61 v2(4299.35,2362) ; v1(2379.15,2870.15) CA3.2@2434.62,2870.15 v1(2379.15,2870.15) ; v1(2393.32,2191.5) 2393.41,2191.41 NR8.2@2433.5,2191.41 v1(2393.32,2191.5) ; R31.1@2645.61,3535.41 2692.5,3535.41 v2(2692.5,3535.5) R31.1@2645.61,3535.41
  other v1: 1832.5,1735 1930,1735 2030,1735 2130,1735 2220,1735 2320,1735 2420,1735 2510,1735 2610,1735 2710,1735 2800,1735 2900,1735 3000,1735 3090,1735 3190,1735 3290,1735 3380,1735 3480,1735 3580,1735 3670,1735 3770,1735 3870,1735 3960,1735 4060,1735 4160,1735 4250,1735 4350,1735 4450,1735 4523,1735 4582,1735 1832.5,1830 4582,1830 1832.5,1930 4582,1930 1832.5,2020 4582,2020 1832.5,2120 4582,2120 1832.5,2220 4582,2220 1832.5,2310 4582,2310 3002.5,2324.5 1832.5,2410 4582,2410 1832.5,2510 4582,2510 1832.5,2600 4582,2600 1832.5,2700 4582,2700 1832.5,2800 4582,2800 1832.5,2890 4582,2890 1832.5,2990 4582,2990 1832.5,3090 4582,3090 1832.5,3180 4582,3180 1832.5,3280 4582,3280 1832.5,3380 4582,3380 1832.5,3470 4582,3470 2355,3535 2398.5,3565.5 1832.5,3570 4582,3570 2394.5,3605.5 4250.5,3613.5 2362.5,3617 1832.5,3670 4582,3670 2252.5,3727.5 2256,3751.5 1832.5,3760 4582,3760 2256.5,3770 2248,3787.5 1832.5,3860 4582,3860 1832.5,3960 4582,3960 1832.5,4050 1915,4050 2015,4050 2115,4050 2205,4050 2305,4050 2405,4050 2495,4050 2595,4050 2695,4050 2785,4050 2885,4050 2985,4050 3075,4050 3175,4050 3275,4050 3365,4050 3465,4050 3565,4050 3655,4050 3755,4050 3855,4050 3945,4050 4045,4050 4145,4050 4235,4050 4335,4050 4435,4050 4485,4050 4582,4050
  other v2: 2554.5,2181.5 2387.5,3495 4359,3765 4314,3765.5
GPB0: pad.PA45 U1.J6 | length 3998.2
  Top Layer w5: U1.J6@2840.89,2847.25 cw(c2840.89,2834.27) 2850.06,2843.45 cw(c2859.23,2852.62) U1.J6@2846.26,2852.62 ; 2846.78,2846.73 ccw(c2856.39,2856.33) v1@2856.39,2842.75 ; 2847.09,2846.42 cw(c2837.91,2837.25) v1@2850.89,2837.25 ; v1@2851.36,2835.02 U1.J6@2845.13,2855.92 ; v1@2852.05,2833.86 U1.J6@2840.89,2852.62 ; v1@2853.01,2832.91 U1.J6@2837.58,2848.38 ; v1@2858.57,2842.3 U1.J6@2837.58,2848.38 ; v1@2859.74,2841.61 U1.J6@2840.89,2852.62 ; v1@2860.7,2840.66 U1.J6@2845.13,2855.92 ; U1.J6@2837.58,2848.38 v1@2856.26,2837.25 ; U1.J6@2837.58,2848.38 v1(2856.39,2837.25) ; U1.J6@2840.89,2852.62 v1@2856.26,2837.25 ; U1.J6@2840.89,2852.62 v1(2856.39,2837.25) ; U1.J6@2845.13,2855.92 v1@2856.26,2837.25 ; U1.J6@2845.13,2855.92 v1(2856.39,2837.25)
  SIGNAL_1 w5: v1(1962,2849) 1971,2840 2080,2840 ; 2046,2840 2080,2840 ; v1@2548.54,1888.27 2570.61,1902.61 v1@2556.27,1880.54 ; v1(2552,1884) 2577,1909 2577,2028.56 pad.PA45@2615.5,2067.06 ; v1@2552,1889.5 ccw(c2552,1902.78) 2561.39,1893.39 ccw(c2570.78,1884) v1@2557.5,1884 ; pad.PA45@2594.37,2067.06 cw(c2543.38,2067.06) 2579.44,2031 cw(c2615.5,1994.94) pad.PA45@2615.5,2045.93 ; pad.PA45@2597.66,2078.37 2581.27,2032.83 ; pad.PA45@2599.37,2067.06 cw(c2560.45,2067.06) 2587.97,2039.53 cw(c2615.5,2012.01) pad.PA45@2615.5,2050.93 ; pad.PA45@2602.36,2076.4 2581.27,2032.83 ; pad.PA45@2604.37,2067.06 cw(c2577.52,2067.06) 2596.51,2048.07 cw(c2615.5,2029.08) pad.PA45@2615.5,2055.93 ; pad.PA45@2606.78,2073.97 2581.27,2032.83 ; pad.PA45@2610.9,2071.1 2581.27,2032.83 ; pad.PA45@2619.54,2062.46 2581.27,2032.83 ; pad.PA45@2622.41,2058.34 2581.27,2032.83 ; pad.PA45@2624.84,2053.92 2581.27,2032.83 ; pad.PA45@2626.81,2049.22 2581.27,2032.83 ; v1@2850.89,2837.25 cw(c2837.61,2837.25) 2847,2827.86 cw(c2856.39,2818.47) v1@2856.39,2831.75 ; v1@2852.06,2840.64 2840.14,2821 ; v1@2859.78,2832.92 2840.14,2821 ; 2080,2840 2095.82,2840 2116.5,2860.68 2116.5,2869.12 2203.88,2956.5 2412.07,2956.5 2528.07,2840.5 2600.5,2840.5 2620,2821 2840.14,2821 ; 2840.14,2821 v1(2856.39,2837.25) 2840.14,2821
  Bottom Layer w5: v1@1956.5,2849 cw(c1943.22,2849) 1952.61,2839.61 cw(c1962,2830.22) v1@1962,2843.5 ; v1@1957.73,2852.46 1943.39,2830.39 ; v1@1965.46,2844.73 1943.39,2830.39 ; 2524.24,1890 cw(c2524.24,1856.24) v1@2548.11,1880.11 ; 2536.31,1890 cw(c2536.31,1868.31) v1@2551.65,1883.65 ; v1(2552,1884) 2546,1890 1993.43,1890 1929,1954.43 1929,2816 v1(1962,2849) 1943.39,2830.39
GPB1: pad.PA46 U1.J5 | length 4818.6
  Top Layer w5: v1(2339,1852) 2544,1852 2615.5,1923.5 pad.PA46@2615.5,1988.32 ; v1@2339.66,1846.54 2362,1852 v1@2339.66,1857.46 ; v1@2342.89,1848.11 cw(c2352.28,1838.72) 2352.28,1852 cw(c2352.28,1865.28) v1@2342.89,1855.89 ; pad.PA46@2595.18,1982.54 2615.5,1949.69 ; pad.PA46@2599.73,1984.95 2615.5,1949.69 ; pad.PA46@2600.56,1973.38 cw(c2564.5,1937.32) 2615.5,1937.32 cw(c2666.49,1937.32) pad.PA46@2630.43,1973.38 ; pad.PA46@2604.1,1976.92 cw(c2576.57,1949.39) 2615.5,1949.39 cw(c2654.42,1949.39) pad.PA46@2626.9,1976.92 ; pad.PA46@2604.49,1986.71 2615.5,1949.69 ; pad.PA46@2607.63,1980.45 cw(c2588.65,1961.47) 2615.5,1961.47 cw(c2642.35,1961.47) pad.PA46@2623.36,1980.45 ; pad.PA46@2609.39,1987.83 2615.5,1949.69 ; pad.PA46@2621.6,1987.83 2615.5,1949.69 ; pad.PA46@2626.5,1986.71 2615.5,1949.69 ; pad.PA46@2631.26,1984.95 2615.5,1949.69 ; pad.PA46@2635.81,1982.54 2615.5,1949.69 ; v1@2820.94,2871.9 U1.J5@2836.65,2887.43 ; v1@2823.04,2873.53 U1.J5@2844.2,2879.88 ; v1@2825.27,2874 ccw(c2825.27,2887.28) 2834.66,2877.89 ccw(c2844.05,2868.5) v1@2830.77,2868.5 ; v1@2828.67,2864.18 U1.J5@2844.2,2879.88 ; v1@2830.3,2866.27 U1.J5@2836.65,2887.43 ; U1.J5@2835.51,2884.12 cw(c2822.54,2884.12) 2831.71,2874.94 cw(c2840.89,2865.77) U1.J5@2840.89,2878.74 ; v1(2825.27,2868.5) U1.J5@2840.89,2884.12 ; v1(2825.27,2868.5) U1.J5@2844.2,2879.88 ; v1(2825.27,2868.5) U1.J5@2836.65,2887.43 ; v1(2825.27,2868.5) U1.J5@2840.89,2884.12 ; U1.J5@2840.89,2884.12 2821.89,2872.84 U1.J5@2840.89,2884.12 ; U1.J5@2840.89,2884.12 2829.61,2865.13 U1.J5@2840.89,2884.12
  SIGNAL_1 w5: v1@2598.04,3479.73 2620.11,3465.39 v1@2605.77,3487.46 ; v1@2601.5,3478.5 cw(c2601.5,3465.22) 2610.89,3474.61 cw(c2620.28,3484) v1@2607,3484 ; v1(2601.5,3484) 2793,3292.5 2793,3056.92 2802.5,3047.42 ; 2802.5,3046.58 2809.5,3039.58 2809.5,2906.68 ; 2809.52,2906.66 2809.52,2884.25 ; v1@2819.77,2868.5 ccw(c2806.49,2868.5) 2815.88,2877.89 ccw(c2825.27,2887.28) v1@2825.27,2874 ; v1@2820.93,2865.12 2809.52,2884.25 ; v1@2828.65,2872.84 2809.52,2884.25 ; 2809.52,2884.25 v1(2825.27,2868.5) 2809.52,2884.25
  Bottom Layer w5: v1(2339,1852) 2331.44,1859.56 1981.45,1859.56 1899,1942.01 1899,3383 1980,3464 2196.55,3464 2202.55,3470 2594.5,3470 ; v1@2596.22,3485.56 2594.5,3470 ; v1@2605.91,3480.71 2594.5,3470 ; 2594.5,3470 2601.5,3477 v1(2601.5,3484) 2594.5,3470
GPG13: NR2.2 U1.T11 | length 1436.9
  Top Layer w5: v1@2599.34,2683.18 U1.T11@2616.34,2698.64 ; v1@2600.13,2683.92 U1.T11@2619.06,2695.14 ; v1@2600.29,2684.04 U1.T11@2620.41,2695.14 ; v1@2601.41,2684.67 U1.T11@2623.56,2690.79 ; v1@2603.5,2685.08 ccw(c2603.5,2698.36) 2612.89,2688.97 ccw(c2622.28,2679.58) v1@2609,2679.58 ; v1@2606.74,2675.13 U1.T11@2623.56,2690.79 ; v1@2607.68,2676.01 U1.T11@2620.41,2695.14 ; v1@2607.84,2676.21 U1.T11@2619.06,2695.14 ; v1@2608.4,2677.08 U1.T11@2616.34,2698.64 ; v1@2608.93,2685.01 cw(c2620.41,2673.53) U1.T11@2620.41,2689.77 ; 2612.19,2688.27 ccw(c2605.32,2695.14) U1.T11@2615.04,2695.14 ; v1(2603.5,2679.58) U1.T11@2619.06,2695.14 ; v1(2603.5,2679.58) U1.T11@2623.56,2690.79 ; v1(2603.5,2679.58) U1.T11@2616.34,2698.64 ; v1(2603.5,2679.58) U1.T11@2620.41,2695.14 ; U1.T11@2619.06,2695.14 U1.T11@2620.41,2695.14
  SIGNAL_1 w5: v1@2335.78,2876.54 2358.36,2863.64 ; v1@2339,2875.5 cw(c2339,2857.39) 2351.8,2870.2 ; v1@2343.08,2884.68 2358.36,2863.64 ; v1@2344.5,2881 ccw(c2352.95,2881) 2346.97,2875.03 ; v1(2603.5,2679.58) 2603.5,2687.64 2579.14,2712 2546.92,2712 2404.46,2854.46 2367.54,2854.46 2341,2881 v1(2339,2881) 2358.36,2863.64
  Bottom Layer w5: v1@2333.54,2881.66 2339,2904 v1@2344.46,2881.66 ; v1@2335.11,2884.89 ccw(c2325.72,2894.28) 2339,2894.28 ccw(c2352.28,2894.28) v1@2342.89,2884.89 ; v1(2339,2881) 2339,3014 2372,3047 2458.5,3047 ; 2466.04,3039.46 cw(c2437.16,3010.59) NR2.2@2478,3010.59 ; NR2.2@2474,3009.59 ccw(c2421.09,3009.59) 2458.5,3047 ; NR2.2@2474.13,3005.39 2464.86,3040.64 ; 2474.57,3030.93 cw(c2454.23,3010.59) NR2.2@2483,3010.59 ; NR2.2@2478.91,3007 2464.86,3040.64 ; NR2.2@2480.23,3025.27 ccw(c2485.5,3030.54) NR2.2@2485.5,3023.09 ; NR2.2@2485.5,3005.59 2485.5,3020 2458.5,3047 ; NR2.2@2485.5,3010.59 2464.86,3040.64 ; NR2.2@2491.21,3015.45 2464.86,3040.64 ; NR2.2@2494.43,3019.33 2464.86,3040.64
GPG14: NR3.2 U1.L11 | length 1149.4
  Top Layer w5: v1@2758.22,2683.38 U1.L11@2773.65,2698.44 ; v1@2760.38,2685.02 U1.L11@2781.19,2690.9 ; v1@2762.54,2685.46 ccw(c2762.54,2699.17) 2772.23,2689.48 ; v1@2765.9,2675.61 U1.L11@2781.19,2690.9 ; v1@2767.57,2677.75 U1.L11@2773.65,2698.44 ; v1@2768.04,2679.96 cw(c2780.89,2679.96) 2771.8,2689.05 ; U1.L11@2772.52,2695.14 cw(c2759.55,2695.14) 2768.72,2685.97 cw(c2777.89,2676.79) U1.L11@2777.89,2689.77 ; v1(2762.54,2679.96) U1.L11@2777.89,2695.14 ; v1(2762.54,2679.96) U1.L11@2781.19,2690.9 ; v1(2762.54,2679.96) U1.L11@2773.65,2698.44 ; v1(2762.54,2679.96) U1.L11@2777.89,2695.14 ; v1@2762.72,2679.96 U1.L11@2777.89,2695.14 ; v1@2762.72,2679.96 U1.L11@2781.19,2690.9 ; v1@2762.72,2679.96 U1.L11@2773.65,2698.44 ; v1@2762.72,2679.96 U1.L11@2777.89,2695.14 ; U1.L11@2777.89,2695.14 2759.2,2684.34 U1.L11@2777.89,2695.14 ; U1.L11@2777.89,2695.14 2766.87,2676.58 U1.L11@2777.89,2695.14
  SIGNAL_2 w5: v1@2461.54,2567.34 2467,2545 v1@2472.46,2567.34 ; v1@2463.11,2564.11 cw(c2453.72,2554.72) 2467,2554.72 cw(c2480.28,2554.72) v1@2470.89,2564.11 ; v1(2467,2568) 2467,2483.09 v1(2494.5,2455.59) ; v1@2489,2455.59 ccw(c2475.72,2455.59) 2485.11,2464.98 ccw(c2494.5,2474.37) v1@2494.5,2461.09 ; v1@2490.22,2452.13 2475.89,2474.2 v1@2497.96,2459.86
  Bottom Layer w5: v1(2467,2568) 2520.2,2568 2615.85,2663.65 2629.2,2663.65 2629.35,2663.5 2642.19,2663.5 2642.33,2663.65 2661.49,2663.65 2661.58,2663.55 2676.55,2663.55 2676.65,2663.65 2746.22,2663.65 ; v1@2467.66,2562.54 2490,2568 v1@2467.66,2573.46 ; v1@2470.89,2564.11 cw(c2480.28,2554.72) 2480.28,2568 cw(c2480.28,2581.28) v1@2470.89,2571.89 ; v1@2757.04,2679.96 cw(c2743.76,2679.96) 2753.15,2670.57 cw(c2762.54,2661.19) v1@2762.54,2674.46 ; v1@2758.21,2683.36 2746.22,2663.65 ; v1@2765.93,2675.64 2746.22,2663.65 ; 2746.22,2663.65 v1(2762.54,2679.96) 2746.22,2663.65
GPG15: NR4.2 NR8.1 U1.U13 | length 1243
  Top Layer w5: NR4.2@2480.68,2429.23 ccw(c2486.1,2434.65) NR4.2@2489.84,2427.96 ; NR4.2@2481,2421.59 ccw(c2463.93,2421.84) 2476,2433.91 ccw(c2482.75,2440.65) NR4.2@2487.4,2432.32 ; NR4.2@2483.73,2413.6 2473.5,2436.41 ; NR4.2@2488,2416.41 ccw(c2474.72,2416.41) 2484.11,2425.8 ccw(c2493.5,2435.19) NR4.2@2493.5,2421.91 ; NR4.2@2488.15,2416.15 2473.5,2436.41 ; NR4.2@2493.5,2421.41 2473.5,2436.41 ; NR4.2@2497.05,2428.02 2473.5,2436.41 ; NR4.2@2498.26,2432.97 2473.5,2436.41 ; U1.U13@2585.12,2628.35 ccw(c2575.94,2619.18) 2575.94,2632.15 ccw(c2575.94,2645.12) U1.U13@2585.12,2635.95 ; U1.U13@2587.87,2626.88 2575.15,2632.15 ; U1.U13@2587.87,2637.42 2575.15,2632.15 ; 2473.5,2436.41 2473.5,2530.5 2575.15,2632.15 ; 2473.5,2436.41 v1(2493.5,2416.41) ; 2473.5,2436.41 2489.25,2412.92 2474.28,2435.33 ; 2473.5,2436.41 2496.99,2420.66 2474.66,2435.54 ; 2473.5,2436.41 v1(2493.5,2416.41) ; 2474.28,2435.33 2496.94,2420.7 2474.89,2435.02 ; 2474.28,2435.33 v1(2493.5,2416.41) ; 2474.66,2435.54 2489.2,2412.97 2474.89,2435.02 ; 2474.66,2435.54 v1(2493.5,2416.41) ; 2474.89,2435.02 v1(2493.5,2416.41) ; 2575.15,2632.15 U1.U13@2588.92,2632.15 2575.15,2632.15
  Bottom Layer w5: v1@2490.03,2412.14 2512.1,2397.8 v1@2497.77,2419.87 ; NR8.1@2493.5,2191.41 2523.5,2221.41 2523.5,2386.41 v1(2493.5,2416.41) ; NR8.1@2493.5,2203.91 ccw(c2493.5,2234.09) 2514.84,2212.75 ; NR8.1@2493.5,2208.91 ccw(c2493.5,2251.16) 2523.38,2221.28 ; v1@2493.5,2410.91 cw(c2493.5,2397.63) 2502.89,2407.02 cw(c2512.27,2416.41) v1@2499,2416.41 ; NR8.1@2506,2196.41 cw(c2524.11,2196.41) 2511.31,2209.21
I2CSCL: pad.PA56 U1.U8 | length 2129.8
  Top Layer w5: v1@2456.54,2765.77 2478.61,2780.11 v1@2464.27,2758.04 ; v1(2460,2761.5) 2488.13,2789.63 U1.U8@2588.92,2789.63 ; v1@2460,2767 ccw(c2460,2780.28) 2469.39,2770.89 ccw(c2478.78,2761.5) v1@2465.5,2761.5 ; U1.U8@2585.12,2785.83 ccw(c2575.94,2776.66) 2575.94,2789.63 ccw(c2575.94,2802.6) U1.U8@2585.12,2793.43 ; U1.U8@2588.28,2784.29 2566.04,2789.63 U1.U8@2588.28,2794.97
  SIGNAL_2 w5: pad.PA56@2210.48,2006.15 2256.02,2022.54 ; pad.PA56@2212.45,2001.46 2256.02,2022.54 ; pad.PA56@2214.89,1997.03 2256.02,2022.54 ; pad.PA56@2217.75,1992.91 2256.02,2022.54 ; pad.PA56@2221.8,1988.32 2259.41,2025.93 2259.41,2083.3 2168,2174.72 2168,2790.86 2190.93,2813.79 2407.71,2813.79 v1(2460,2761.5) 2441.39,2780.11 ; pad.PA56@2221.8,1999.44 ccw(c2221.8,2026.29) 2240.78,2007.3 ccw(c2259.77,1988.32) pad.PA56@2232.92,1988.32 ; pad.PA56@2221.8,2004.44 ccw(c2221.8,2043.36) 2249.32,2015.84 ccw(c2276.84,1988.32) pad.PA56@2237.92,1988.32 ; pad.PA56@2221.8,2009.44 ccw(c2221.8,2060.43) 2257.85,2024.37 ccw(c2293.91,1988.32) pad.PA56@2242.92,1988.32 ; pad.PA56@2226.39,1984.27 2256.02,2022.54 ; pad.PA56@2230.51,1981.41 2256.02,2022.54 ; pad.PA56@2234.94,1978.97 2256.02,2022.54 ; pad.PA56@2239.63,1977 2256.02,2022.54 ; v1@2454.5,2761.5 ccw(c2441.22,2761.5) 2450.61,2770.89 ccw(c2460,2780.28) v1@2460,2767 ; v1@2455.73,2758.04 2441.39,2780.11 ; v1@2463.46,2765.77 2441.39,2780.11
I2CSDA: pad.PA55 U1.M9 | length 2395.1
  Top Layer w5: v1@2725.97,2745.43 U1.M9@2742.18,2761.46 ; v1@2727.99,2747.02 U1.M9@2749.72,2753.91 ; v1@2730.28,2747.51 ccw(c2730.28,2760.79) 2739.67,2751.4 ccw(c2749.05,2742.01) v1@2735.78,2742.01 ; v1@2733.69,2737.7 U1.M9@2749.72,2753.91 ; v1@2735.28,2739.73 U1.M9@2742.18,2761.46 ; U1.M9@2741.02,2758.13 cw(c2728.05,2758.13) 2737.22,2748.96 cw(c2746.4,2739.79) U1.M9@2746.4,2752.76 ; v1(2730.28,2742.01) U1.M9@2746.4,2758.13 ; v1(2730.28,2742.01) U1.M9@2749.72,2753.91 ; v1(2730.28,2742.01) U1.M9@2742.18,2761.46 ; v1(2730.28,2742.01) U1.M9@2746.4,2758.13 ; U1.M9@2746.4,2758.13 2726.88,2746.34 U1.M9@2746.4,2758.13 ; U1.M9@2746.4,2758.13 2734.61,2738.62 U1.M9@2746.4,2758.13
  SIGNAL_2 w5: pad.PA55@2200.67,2067.06 ccw(c2149.68,2067.06) 2185.74,2103.11 ccw(c2221.8,2139.17) pad.PA55@2221.8,2088.18 ; pad.PA55@2203.96,2055.74 2187.57,2101.28 ; pad.PA55@2205.67,2067.06 ccw(c2166.75,2067.06) 2194.27,2094.58 ccw(c2221.8,2122.1) pad.PA55@2221.8,2083.18 ; pad.PA55@2208.66,2057.71 2187.57,2101.28 ; pad.PA55@2210.67,2067.06 ccw(c2183.82,2067.06) 2202.81,2086.04 ccw(c2221.8,2105.03) pad.PA55@2221.8,2078.18 ; pad.PA55@2213.08,2060.15 2187.57,2101.28 ; pad.PA55@2217.2,2063.01 2187.57,2101.28 ; pad.PA55@2225.84,2071.65 2187.57,2101.28 ; pad.PA55@2228.7,2075.77 2187.57,2101.28 ; pad.PA55@2231.14,2080.2 2187.57,2101.28 ; pad.PA55@2233.11,2084.89 2187.57,2101.28 ; v1@2724.78,2742.01 ccw(c2711.5,2742.01) 2720.89,2751.4 ccw(c2730.28,2760.79) v1@2730.28,2747.51 ; v1@2725.94,2738.62 2714.28,2758.01 ; v1@2733.66,2746.34 2714.28,2758.01 ; 2187.57,2101.28 pad.PA55@2221.8,2067.06 2158,2130.85 2158,2795 2186.79,2823.79 2496.07,2823.79 2539.98,2779.88 2564.12,2779.88 2585.99,2758.01 2714.28,2758.01 ; 2714.28,2758.01 v1(2730.28,2742.01) 2714.28,2758.01
I2SLRCK: pad.PA40 U1.P7 | length 2594.8
  Top Layer w5: v1@2661.6,2809.06 U1.P7@2679.4,2824.71 ; v1@2662.3,2809.72 U1.P7@2681.43,2821.13 ; v1@2662.53,2809.89 U1.P7@2683.41,2821.13 ; v1@2663.63,2810.48 U1.P7@2686.5,2816.73 ; v1@2665.68,2810.88 ccw(c2665.68,2824.16) 2675.07,2814.77 ccw(c2684.46,2805.38) v1@2671.18,2805.38 ; v1@2668.86,2800.89 U1.P7@2686.5,2816.73 ; v1@2669.79,2801.72 U1.P7@2683.41,2821.13 ; v1@2670.02,2802 U1.P7@2681.43,2821.13 ; v1@2670.51,2802.74 U1.P7@2679.4,2824.71 ; v1@2670.86,2810.55 cw(c2683.41,2798.01) U1.P7@2683.41,2815.75 ; 2675.63,2815.33 ccw(c2669.83,2821.13) U1.P7@2678.03,2821.13 ; U1.P7@2683.41,2819.41 U1.P7@2683.41,2821.13 ; v1(2665.68,2805.38) U1.P7@2681.43,2821.13 ; v1(2665.68,2805.38) U1.P7@2686.5,2816.73 ; v1(2665.68,2805.38) U1.P7@2679.4,2824.71 ; v1(2665.68,2805.38) U1.P7@2683.41,2821.13 ; U1.P7@2681.43,2821.13 U1.P7@2683.41,2821.13
  Bottom Layer w5: v1@2665.62,2805.38 v1(2665.68,2805.38) 2659.8,2799.5 2625.72,2799.5 2615.72,2789.5 2543.5,2789.5 2526,2807 2413.02,2807 2342,2735.98 2342,2281.5 2358.5,2265 2358.5,2161.22 2334,2136.72 2334,1971.86 2365.86,1940 2803.4,1940 pad.PA40@2851.72,1988.32 ; pad.PA40@2830.59,1988.32 cw(c2779.6,1988.32) 2815.66,1952.26 cw(c2851.72,1916.2) pad.PA40@2851.72,1967.19 ; pad.PA40@2833.88,1999.63 2817.49,1954.09 ; pad.PA40@2835.59,1988.32 cw(c2796.67,1988.32) 2824.19,1960.79 cw(c2851.72,1933.27) pad.PA40@2851.72,1972.19 ; pad.PA40@2838.58,1997.66 2817.49,1954.09 ; pad.PA40@2840.59,1988.32 cw(c2813.74,1988.32) 2832.73,1969.33 cw(c2851.72,1950.34) pad.PA40@2851.72,1977.19 ; pad.PA40@2843,1995.22 2817.49,1954.09 ; pad.PA40@2847.12,1992.36 2817.49,1954.09 ; pad.PA40@2855.76,1983.72 2817.49,1954.09 ; pad.PA40@2858.62,1979.6 2817.49,1954.09 ; pad.PA40@2861.06,1975.18 2817.49,1954.09 ; pad.PA40@2863.03,1970.48 2817.49,1954.09
I2SSCLK: pad.PA41 U1.R7 | length 1736.1
  Top Layer w5: v1@2376.5,2354 ccw(c2363.22,2354) 2372.61,2363.39 ccw(c2382,2372.78) v1@2382,2359.5 ; v1@2377.72,2350.54 2363.5,2372.5 ; v1@2385.46,2358.28 2363.5,2372.5 ; 2422.75,2805.75 2445,2805.75 ; U1.R7@2646.54,2821.13 cw(c2633.56,2821.13) 2642.74,2811.95 cw(c2651.91,2802.78) U1.R7@2651.91,2815.75 ; U1.R7@2647.67,2824.43 2636.54,2805.75 ; U1.R7@2655.21,2816.89 2636.54,2805.75 ; 2363.5,2372.5 v1(2382,2354) 2363.5,2372.5 ; 2363.5,2372.5 2363.5,2776.48 2392.77,2805.75 2445,2805.75 ; 2445,2805.75 2636.54,2805.75 ; 2636.54,2805.75 U1.R7@2651.91,2821.13 2636.54,2805.75
  SIGNAL_2 w5: v1@2378.6,2349.68 2398.5,2337.5 ; v1@2382,2348.5 cw(c2382,2335.22) 2391.39,2344.61 cw(c2400.78,2354) v1@2387.5,2354 ; v1(2382,2354) 2398.5,2337.5 ; v1@2386.32,2357.4 2398.5,2337.5 ; pad.PA41@2751.85,2067.06 ccw(c2700.86,2067.06) 2736.92,2103.11 ccw(c2772.98,2139.17) pad.PA41@2772.98,2088.18 ; pad.PA41@2756.85,2067.06 ccw(c2717.93,2067.06) 2745.45,2094.58 ccw(c2772.98,2122.1) pad.PA41@2772.98,2083.18 ; pad.PA41@2761.85,2067.06 ccw(c2735,2067.06) 2753.99,2086.04 ccw(c2772.98,2105.03) pad.PA41@2772.98,2078.18 ; pad.PA41@2772.98,2067.06 2695.03,2145 2537.94,2145 2398.5,2284.44 2398.5,2337.5
I2SSDI: pad.PA43 U1.L8 | length 3907.2
  Top Layer w5: U1.L8@2777.89,2784.26 cw(c2777.89,2771.28) 2787.07,2780.46 cw(c2796.24,2789.63) U1.L8@2783.27,2789.63 ; 2783.8,2783.73 ccw(c2794,2793.93) v1@2794,2779.5 ; 2784.95,2782.58 cw(c2776.37,2774) v1@2788.5,2774 ; v1@2789.02,2771.67 U1.L8@2782.13,2792.94 ; v1@2789.71,2770.55 U1.L8@2777.89,2789.63 ; v1@2790.66,2769.63 U1.L8@2774.58,2785.4 ; v1@2796.18,2779.05 U1.L8@2774.58,2785.4 ; v1@2797.32,2778.39 U1.L8@2777.89,2789.63 ; v1@2798.27,2777.47 U1.L8@2782.13,2792.94 ; U1.L8@2774.58,2785.4 v1@2793.52,2774 ; U1.L8@2774.58,2785.4 v1(2794,2774) ; U1.L8@2777.89,2789.63 v1@2793.52,2774 ; U1.L8@2777.89,2789.63 v1(2794,2774) ; U1.L8@2782.13,2792.94 v1@2793.52,2774 ; U1.L8@2782.13,2792.94 v1(2794,2774) ; v1@2793.52,2774 v1(2794,2774)
  SIGNAL_1 w5: v1(1963,2820) 1973,2830 2071,2830 ; 2046,2830 2071,2830 ; v1@2605.54,1896.27 2627.61,1910.61 v1@2613.27,1888.54 ; v1(2609,1892) 2655,1938 2655,2027.82 pad.PA43@2694.24,2067.06 ; v1@2609,1897.5 ccw(c2609,1910.78) 2618.39,1901.39 ccw(c2627.78,1892) v1@2614.5,1892 ; pad.PA43@2673.11,2067.06 cw(c2622.12,2067.06) 2658.18,2031 cw(c2694.24,1994.94) pad.PA43@2694.24,2045.93 ; pad.PA43@2676.4,2078.37 2660.01,2032.83 ; pad.PA43@2678.11,2067.06 cw(c2639.19,2067.06) 2666.71,2039.53 cw(c2694.24,2012.01) pad.PA43@2694.24,2050.93 ; pad.PA43@2681.1,2076.4 2660.01,2032.83 ; pad.PA43@2683.11,2067.06 cw(c2656.26,2067.06) 2675.25,2048.07 cw(c2694.24,2029.08) pad.PA43@2694.24,2055.93 ; pad.PA43@2685.52,2073.97 2660.01,2032.83 ; pad.PA43@2689.64,2071.1 2660.01,2032.83 ; pad.PA43@2698.28,2062.46 2660.01,2032.83 ; pad.PA43@2701.14,2058.34 2660.01,2032.83 ; pad.PA43@2703.58,2053.92 2660.01,2032.83 ; pad.PA43@2705.55,2049.22 2660.01,2032.83 ; 2782.9,2784.1 ccw(c2794,2795.19) v1@2794,2779.5 ; 2785.32,2781.68 cw(c2777.64,2774) v1@2788.5,2774 ; v1@2789.78,2770.48 2777.5,2789.5 ; v1@2797.25,2778.44 2777.5,2789.5 ; 2071,2830 2099.96,2830 2126.5,2856.54 2126.5,2864.98 2208.02,2946.5 2407.93,2946.5 2548.43,2806 2643.14,2806 2659.38,2789.76 2708,2789.76 2708.25,2789.5 2777.5,2789.5 ; 2777.5,2789.5 2793.5,2773.5 v1(2794,2774) 2777.5,2789.5
  Bottom Layer w5: v1@1957.5,2820 cw(c1944.22,2820) 1953.61,2810.61 cw(c1963,2801.22) v1@1963,2814.5 ; v1@1958.73,2823.46 1944.39,2801.39 ; v1@1966.46,2815.73 1944.39,2801.39 ; v1(2609,1892) 2601,1900 1997.57,1900 1939,1958.57 1939,2796 v1(1963,2820) 1944.39,2801.39